# EAGLE board untittestled (EAGLE 7.2.0)
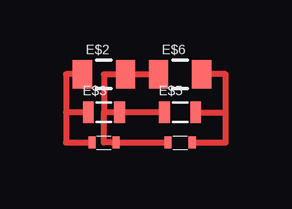
[diagram p0: board, top side]

No outline drawn. Coordinates in mm, seen from the top.
Copper layers (1*16): Top 0.035mm / dielectric 1.5mm / Bottom 0.035mm
Design rules "default": minimum track width 0.2mm, minimum drill 0.2mm, track to track 0.2mm, track to pad 0.2mm, pad to pad 0.2mm, via to via 0.2mm, smd to smd 0.2mm, copper to edge 0.2mm, drill to drill 0.2mm, minimum pad ring 10mil, minimum via ring 8mil, stop-mask expansion 4mil, vias tented up to drill 0mil, thermal gap 10mil

## Footprints (pad centres in the part's own frame; a part is rotated, then mirrored left to right if it is on the bottom)
R0402 = smd 0.3 x 0.5: 1 -0.503,0; 2 0.503,0
R0805 = smd 0.8 x 1.2: 1 -0.9,0; 2 0.9,0
C0603 = smd 0.45 x 0.9: 1 -0.65,0; 2 0.65,0

## Placement (x,y rotation side)
E$1  [R0402]  1.27,1.27 0 top
E$2  [R0805]  1.27,4.13 0 top
E$3  [C0603]  1.27,2.54 0 top
E$4  [R0402]  4.45,1.27 0 top
E$5  [C0603]  4.45,2.54 0 top
E$6  [R0805]  4.45,4.13 0 top

## Library data of the parts
E$1-E$6 = CasaLibrary

## Tracks (layer width: path | path; a pad name or v marks a point on that pad's centre or on a via)
S$1
  Top 0.254: 0.32,4.13 -0.32,4.13 -0.32,2.54 | 0.64,2.54 -0.32,2.54 | -0.32,2.54 -0.32,1.27 0.64,1.27
S$2
  Top 0.254: 1.59,1.27 1.27,1.27 1.27,2.54 | 1.27,2.54 1.27,4.13 3.49,4.13 | 3.81,2.54 1.27,2.54
S$3
  Top 0.254: 1.91,1.27 3.81,1.27
S$4
  Top 0.254: 5.08,1.27 6.35,1.27 6.35,2.54 | 6.35,2.54 6.35,4.13 5.4,4.13 | 5.08,2.54 6.35,2.54